# EAGLE board CT_schematic (EAGLE 7.6.0)

Size 100 x 80 mm. Coordinates in mm from the lower left corner, seen from the top.
Outline: 0,0 100,0 100,80 0,80 0,0
Copper layers (1*16): Top 0.035mm / dielectric 1.5mm / Bottom 0.035mm
Design rules "default": minimum track width 10mil, minimum drill 24mil, track to track 8mil, track to pad 8mil, pad to pad 8mil, via to via 8mil, smd to smd 8mil, copper to edge 40mil, drill to drill 8mil, minimum pad ring 10mil, minimum via ring 8mil, stop-mask expansion 4mil, vias tented up to drill 0mil, thermal gap 10mil

## Footprints (pad centres in the part's own frame; a part is rotated, then mirrored left to right if it is on the bottom)
C0603 = smd 0.8 x 0.8: 1 -0.762,0; 2 0.762,0
C0402 = smd 0.5 x 0.5: 1 -0.508,0; 2 0.508,0
C1210 = smd 1.2 x 2.5: 1 -1.524,0; 2 1.524,0
C0805 = smd 1.2 x 1.3: 1 -1.016,0; 2 1.016,0
C1206 = smd 1.3 x 1.6: 1 -1.524,0; 2 1.524,0
L0603 = smd 0.8 x 0.8: 1 -0.762,0; 2 0.762,0
DR1040 = smd 1.6 x 3.2: 1 -4.458,0; 2 4.458,0
R0603 = smd 0.8 x 0.8: 1 -0.762,0; 2 0.762,0
LQFP64 = smd 0.3 x 1.2: 1 -3.75,-5.75; 2 -3.25,-5.75; 3 -2.75,-5.75; 4 -2.25,-5.75; 5 -1.75,-5.75; 6 -1.25,-5.75; 7 -0.75,-5.75; 8 -0.25,-5.75; 9 0.25,-5.75; 10 0.75,-5.75; 11 1.25,-5.75; 12 1.75,-5.75; 13 2.25,-5.75; 14 2.75,-5.75; 15 3.25,-5.75; 16 3.75,-5.75; 33 3.75,5.75; 34 3.25,5.75; 35 2.75,5.75; 36 2.25,5.75; 37 1.75,5.75; 38 1.25,5.75; 39 0.75,5.75; 40 0.25,5.75; 41 -0.25,5.75; 42 -0.75,5.75; 43 -1.25,5.75; 44 -1.75,5.75; 45 -2.25,5.75; 46 -2.75,5.75; 47 -3.25,5.75; 48 -3.75,5.75 | smd 1.2 x 0.3: 17 5.75,-3.75; 18 5.75,-3.25; 19 5.75,-2.75; 20 5.75,-2.25; 21 5.75,-1.75; 22 5.75,-1.25; 23 5.75,-0.75; 24 5.75,-0.25; 25 5.75,0.25; 26 5.75,0.75; 27 5.75,1.25; 28 5.75,1.75; 29 5.75,2.25; 30 5.75,2.75; 31 5.75,3.25; 32 5.75,3.75; 49 -5.75,3.75; 50 -5.75,3.25; 51 -5.75,2.75; 52 -5.75,2.25; 53 -5.75,1.75; 54 -5.75,1.25; 55 -5.75,0.75; 56 -5.75,0.25; 57 -5.75,-0.25; 58 -5.75,-0.75; 59 -5.75,-1.25; 60 -5.75,-1.75; 61 -5.75,-2.25; 62 -5.75,-2.75; 63 -5.75,-3.25; 64 -5.75,-3.75
TST-110-05-T-D-RA = drill 1 pad 1.7 square: 1 0,0 | drill 1 pad 1.7: 2 0,2.54; 3 2.54,0; 4 2.54,2.54; 5 5.08,0; 6 5.08,2.54; 7 7.62,0; 8 7.62,2.54; 9 10.16,0; 10 10.16,2.54; 11 12.7,0; 12 12.7,2.54; 13 15.24,0; 14 15.24,2.54; 15 17.78,0; 16 17.78,2.54; 17 20.32,0; 18 20.32,2.54; 19 22.86,0; 20 22.86,2.54
FCI_10118193-0001LF = smd 0.4 x 1.35: 1 -1.3,2.675; 2 -0.65,2.675; 3 0,2.675; 4 0.65,2.675; 5 1.3,2.675 | smd 1.6 x 1.4: 6 -3.2,2.45; 7 3.2,2.45 | smd 1.9 x 1.9: 8 -1.2,0; 9 1.2,0 | hole 0.5: -3.3,0; 3.3,0
SOT143B = smd 1 x 0.7: 1 -0.75,-1 | smd 0.6 x 0.7: 2 0.95,-1; 3 0.95,1; 4 -0.95,1
QFN-28 = smd 0.813 x 0.305: 1 -2.451,1.5; 2 -2.451,1; 3 -2.451,0.5; 4 -2.451,0; 5 -2.451,-0.5; 6 -2.451,-1; 7 -2.451,-1.5; 15 2.451,-1.5; 16 2.451,-1; 17 2.451,-0.5; 18 2.451,0; 19 2.451,0.5; 20 2.451,1; 21 2.451,1.5 | smd 0.305 x 0.813: 8 -1.5,-2.451; 9 -1,-2.451; 10 -0.5,-2.451; 11 0,-2.451; 12 0.5,-2.451; 13 1,-2.451; 14 1.5,-2.451; 22 1.5,2.451; 23 1,2.451; 24 0.5,2.451; 25 0,2.451; 26 -0.5,2.451; 27 -1,2.451; 28 -1.5,2.451 | smd 3.607 x 3.607: 29 0,0
SJ-43515TS-SMT-TR = smd 2.2 x 3: 1 0.6,-7.4; 4 3.4,-7.4 | smd 3 x 3: 2 12.8,-7.4; 5 17,-3 | smd 2 x 3: 3 5.3,0; 6 2.5,0 | drill 1.8: P$7 4.5,-3.69; P$8 11.54,-3.69
ABLS-12.288MHZ-B4-T = smd 5.6 x 2.8: 1 -3.81,0; 2 5.69,0
ASEK = smd 1.4 x 1: 1 -1.1,-0.8; 2 1.1,-0.8; 3 1.1,0.8; 4 -1.1,0.8
ASFL1 = smd 1.7 x 1.5: 1 -1.27,-1.1; 2 1.27,-1.1; 3 1.27,1.1; 4 -1.27,1.1
TSOT-23-5 = smd 1.3 x 0.62: 1 -1.31,0.95; 2 -1.31,0; 3 -1.31,-0.95; 4 1.31,-0.95; 5 1.31,0.95
DFN8_2X3MC = smd 0.813 x 0.305: 1 -1.398,0.75; 2 -1.398,0.25; 3 -1.398,-0.25; 4 -1.398,-0.75; 5 1.398,-0.75; 6 1.398,-0.25; 7 1.398,0.25; 8 1.398,0.75 | smd 1.753 x 1.549: 9 0,0
JST-2-SMD = smd 1 x 4.6: 1 -1,-3.7; 2 1,-3.7 | smd 1.6 x 3.4: NC1 -3.4,1.5; NC2 3.4,1.5
SON-6 = smd 0.55 x 0.3: 1 -0.355,0.5 | smd 0.52 x 0.3: 2 -0.37,0; 3 -0.37,-0.5; 4 0.37,-0.5; 5 0.37,0; 6 0.37,0.5
SW_4-1437565-2 = smd 1.4 x 2.1: 1 -2.23,4.55; 2 -2.23,-4.55; 3 2.23,4.55; 4 2.23,-4.55
LGM67K-G1J2-24-Z = smd 0.8 x 1.4: A -2,0; C 0,0
NC7SZ125M5X = smd 1.3 x 0.7: 1 -1.3,0.95; 2 -1.3,0; 3 -1.3,-0.95; 4 1.3,-0.95; 5 1.3,0.95
DUMMY_PACKAGE_155 = drill 0.3: 1 0,-1; 2 1.5,-1; 3 3,-1

## Placement (x,y rotation side)
C1  1e-07  [C0603]  -19.05,68.58 0 top  (outside the outline)
C2  1e-07  [C0603]  -22.86,68.58 0 top  (outside the outline)
C3  1e-07  [C0603]  -26.67,68.58 0 top  (outside the outline)
C4  1e-07  [C0603]  -30.48,68.58 0 top  (outside the outline)
C5  4.7e-06  [C0603]  -15.24,68.58 0 top  (outside the outline)
C6  1e-08  [C0603]  -34.29,68.58 0 top  (outside the outline)
C7  1e-06  [C0603]  -38.1,68.58 0 top  (outside the outline)
C8  1e-07  [C0603]  -41.91,68.58 0 top  (outside the outline)
C9  1e-07  [C0402]  -15.24,73.66 0 top  (outside the outline)
C10  2.2e-05  [C1210]  -57.15,50.8 0 top  (outside the outline)
C11  2.2e-05  [C1210]  -63.5,50.8 0 top  (outside the outline)
C12  1e-09  [C0402]  -19.05,73.66 0 top  (outside the outline)
C13  1e-09  [C0402]  -22.86,73.66 0 top  (outside the outline)
C14  1e-07  [C0402]  -26.67,73.66 0 top  (outside the outline)
C15  1e-07  [C0402]  -30.48,73.66 0 top  (outside the outline)
C16  1e-07  [C0402]  -34.29,73.66 0 top  (outside the outline)
C17  1e-07  [C0402]  -38.1,73.66 0 top  (outside the outline)
C18  1e-07  [C0402]  -41.91,73.66 0 top  (outside the outline)
C19  1e-05  [C0805]  -34.29,57.15 0 top  (outside the outline)
C20  1e-05  [C0805]  -39.37,57.15 0 top  (outside the outline)
C21  1e-05  [C0805]  -44.45,57.15 0 top  (outside the outline)
C22  1e-05  [C0805]  -49.53,57.15 0 top  (outside the outline)
C23  1e-05  [C0805]  -54.61,57.15 0 top  (outside the outline)
C24  2.2e-11  [C0402]  -69.85,68.58 0 top  (outside the outline)
C25  2.2e-11  [C0402]  -73.66,68.58 0 top  (outside the outline)
C26  1e-08  [C0402]  -45.72,73.66 0 top  (outside the outline)
C27  1e-08  [C0402]  -49.53,73.66 0 top  (outside the outline)
C28  1e-05  [C0805]  -59.69,57.15 0 top  (outside the outline)
C29  1e-05  [C0805]  -64.77,57.15 0 top  (outside the outline)
C30  1e-07  [C0402]  -53.34,73.66 0 top  (outside the outline)
C31  1e-05  [C1206]  -69.85,49.53 0 top  (outside the outline)
C32  1e-05  [C1206]  -16.51,57.15 0 top  (outside the outline)
C33  1e-08  [C0402]  -57.15,73.66 0 top  (outside the outline)
C34  1e-08  [C0402]  -60.96,73.66 0 top  (outside the outline)
F1  240.0  [L0603]  -45.72,68.58 0 top  (outside the outline)
I1  5.2e-06  [DR1040]  -55.88,20.32 0 top  (outside the outline)
R2  1000.0  [R0603]  -49.53,68.58 0 top  (outside the outline)
R4  4700.0  [R0603]  -53.34,68.58 0 top  (outside the outline)
R5  10000.0  [R0603]  -36.83,63.5 0 top  (outside the outline)
R6  10000.0  [R0603]  -41.91,63.5 0 top  (outside the outline)
R7  47000.0  [R0603]  -46.99,63.5 0 top  (outside the outline)
R8  47000.0  [R0603]  -52.07,63.5 0 top  (outside the outline)
R9  47000.0  [R0603]  -57.15,63.5 0 top  (outside the outline)
R10  680.0  [R0603]  -57.15,68.58 0 top  (outside the outline)
R11  220000.0  [R0603]  -21.59,63.5 0 top  (outside the outline)
R12  1000000.0  [R0603]  -16.51,63.5 0 top  (outside the outline)
R13  10000.0  [R0603]  -62.23,63.5 0 top  (outside the outline)
R14  10000.0  [R0603]  -67.31,63.5 0 top  (outside the outline)
R15  9100.0  [R0603]  -60.96,68.58 0 top  (outside the outline)
R16  680000.0  [R0603]  -26.67,63.5 0 top  (outside the outline)
R17  120000.0  [R0603]  -31.75,63.5 0 top  (outside the outline)
R18  2000.0  [R0603]  -64.77,68.58 0 top  (outside the outline)
R19  10000.0  [R0603]  -72.39,63.5 0 top  (outside the outline)
U1  STM32L072RBT6  [LQFP64]  -24.13,21.59 0 top  (outside the outline)
U2  TST-110-05-T-D-RA  [TST-110-05-T-D-RA]  -46.99,40.64 0 top  (outside the outline)
U3  10118193-0001LF  [FCI_10118193-0001LF]  -50.8,31.75 0 top  (outside the outline)
U4  prtr5v0u2ax  [SOT143B]  -73.66,73.66 0 top  (outside the outline)
U5  WM8731CLSEFL  [QFN-28]  -49.53,50.8 0 top  (outside the outline)
U6  SJ-43515TS-SMT-TR  [SJ-43515TS-SMT-TR]  -39.37,10.16 0 top  (outside the outline)
U7  SJ-43515TS-SMT-TR  [SJ-43515TS-SMT-TR]  -67.31,10.16 0 top  (outside the outline)
U8  ABLS-12.288MHZ-B4-T  [ABLS-12.288MHZ-B4-T]  -25.4,50.8 0 top  (outside the outline)
U9  ASEK-32.768KHz-ECST  [ASEK]  -66.04,43.18 0 top  (outside the outline)
U10  ASFL1-25MHZ-NCS  [ASFL1]  -41.91,33.02 0 top  (outside the outline)
U11  ltc3406es5  [TSOT-23-5]  -69.85,57.15 0 top  (outside the outline)
U12  MCP73831T-2ACI/MC  [DFN8_2X3MC]  -26.67,77.47 0 top  (outside the outline)
U13  S2B-PH-SM4-TB(LF)(SN)  [JST-2-SMD]  -22.86,34.29 0 top  (outside the outline)
U14  TPS3895ADRYR  [SON-6]  -20.32,77.47 0 top  (outside the outline)
U15  4-1437565-2  [SW_4-1437565-2]  -45.72,21.59 0 top  (outside the outline)
U16  Q65110A2395  [LGM67K-G1J2-24-Z]  -36.83,50.8 0 top  (outside the outline)
U17  nc7sz125m5x  [NC7SZ125M5X]  -21.59,57.15 0 top  (outside the outline)
U18  nc7sz125m5x  [NC7SZ125M5X]  -27.94,57.15 0 top  (outside the outline)
U19  Dummy  [DUMMY_PACKAGE_155]  -17.78,78.74 0 top  (outside the outline)

## Library data of the parts
C1-C34 F1 I1 R2 R4-R19 U1-U19 = circuit_tree

## Nets
CLK_CRYSTAL_U5_1: C24.1 U5.1 U8.1
CLK_CRYSTAL_U5_2: C25.1 U5.2 U8.2
CLK_U1_3: U1.3 U9.3
CLK_U1_5: U1.5 U10.3
GND: C1.2 C2.2 C3.2 C4.2 C5.2 C6.2 C7.2 C8.2 C9.2 C13.2 C14.2 C15.2 C16.2 C17.2 C18.2 C19.2 C20.2 C21.2 C22.2 C23.2 C24.2 C25.2 C26.2 C27.2 C28.2 C29.1 C29.2 C30.2 C31.2 C32.2 C33.2 C34.2 R2.2 R5.2 R7.2 R8.2 R9.2 R11.2 R15.2 R17.2 R18.2 U1.12 U1.18 U1.31 U1.47 U1.63 U2.4 U2.6 U2.8 U2.10 U2.12 U2.14 U2.16 U2.18 U2.20 U3.5 U3.6 U3.7 U3.8 U3.9 U4.1 U5.4 U5.15 U5.19 U5.25 U5.26 U5.29 U6.1 U7.1 U9.2 U10.2 U11.2 U12.6 U12.9 U13.2 U14.2 U16.C U17.2 U17.3 U18.1 U18.3 U19.1
INPUT_USBPOWER_5V: C31.1 R19.2 U3.1 U4.4 U12.1 U12.2
NET_U1_7: R4.1 U1.7 U18.4
NET_U1_13: C6.1 C7.1 F1.1 U1.13
NET_U1_60: R5.1 U1.60
NET_U1_61: U16.A
NET_U1_62: U15.3 U15.4
NET_U5_9: U5.9
NET_U5_20: C18.1 C23.1 U5.20
NET_U6_2: C11.1 R8.1 U6.2
NET_U6_5: C10.1 R7.1 U6.5
NET_U6_13: C10.2
NET_U6_14: C11.2
NET_U7_5: C12.1 C13.1 R9.1 R10.1 U7.5
NET_U7_21: R10.2
NET_U7_22: C12.2
NET_U11_1: U11.1
NET_U11_3: I1.1 U11.3
NET_U11_5: R11.1 R12.1 U11.5
NET_U11_ATNET_3: I1.2 R12.2
NET_U12_5: R19.1 U12.5
NET_U12_8: R18.1 U12.8
NET_U14_1: R14.1 R15.1 U14.1
NET_U14_3: R16.2 R17.1 U14.3
NET_U14_4: R13.1 U14.4 U17.4 U18.2
NET_U15_1: R2.1 U15.1 U15.2
PROC_I2S2_CK: U1.34 U5.7
PROC_I2S2_SD: U1.11 U5.8
PROC_I2S2_WS: U1.33 U5.9 U5.11
PROC_SYS_SWCLK: U1.49 U2.9
PROC_SYS_SWDIO: U1.46 U2.7
PROC_TIM2_CH1: U1.14 U19.3
PROC_TIM2_CH3: U1.16 U19.2
PROC_USB_DM: U1.44 U3.2 U4.3
PROC_USB_DP: U1.45 U3.3 U4.2
RST_OUT_U2_SRESET_B: R6.1 U2.15 U17.1
VCC_S1_3V7: C28.1 C32.1 U11.4 U12.3 U12.4 U13.1
VCC_TIER1_3V3: C1.1 C2.1 C3.1 C4.1 C5.1 C8.1 C9.1 C14.1 C15.1 C16.1 C17.1 C19.1 C20.1 C21.1 C22.1 C26.1 C27.1 C29.2 C30.1 C33.1 C34.1 F1.2 I1.2 R4.2 R6.2 R12.2 R13.2 R14.2 R16.1 U1.1 U1.19 U1.32 U1.48 U1.64 U2.1 U5.3 U5.5 U5.12 U5.18 U9.4 U10.4 U14.6 U17.5 U18.5

## Tracks (layer width: path | path; a pad name or v marks a point on that pad's centre or on a via)
CLK_CRYSTAL_U5_1  (2 unrouted)
CLK_CRYSTAL_U5_2  (2 unrouted)
CLK_U1_3  (1 unrouted)
CLK_U1_5  (1 unrouted)
GND  (81 unrouted)
INPUT_USBPOWER_5V  (5 unrouted)
NET_U1_7  (2 unrouted)
NET_U1_13  (3 unrouted)
NET_U1_60  (1 unrouted)
NET_U1_62  (1 unrouted)
NET_U5_20  (2 unrouted)
NET_U6_2  (2 unrouted)
NET_U6_5  (2 unrouted)
NET_U7_5  (4 unrouted)
NET_U11_3  (1 unrouted)
NET_U11_5  (2 unrouted)
NET_U11_ATNET_3  (1 unrouted)
NET_U12_5  (1 unrouted)
NET_U12_8  (1 unrouted)
NET_U14_1  (2 unrouted)
NET_U14_3  (2 unrouted)
NET_U14_4  (3 unrouted)
NET_U15_1  (2 unrouted)
PROC_I2S2_CK  (1 unrouted)
PROC_I2S2_SD  (1 unrouted)
PROC_I2S2_WS  (2 unrouted)
PROC_SYS_SWCLK  (1 unrouted)
PROC_SYS_SWDIO  (1 unrouted)
PROC_TIM2_CH1  (1 unrouted)
PROC_TIM2_CH3  (1 unrouted)
PROC_USB_DM  (2 unrouted)
PROC_USB_DP  (2 unrouted)
RST_OUT_U2_SRESET_B  (2 unrouted)
VCC_S1_3V7  (5 unrouted)
VCC_TIER1_3V3  (43 unrouted)